# Altium PCB USB_TO_IO_PCB_V102.PcbDoc
Units mil, origin at the board's own origin, x right, y up, seen from the top; angles counter-clockwise.
Board outline 6000 x 4000 mil, 2 copper layers (Top Layer, Bottom Layer); 28 components, 29 nets, 113 pads, 13 vias.
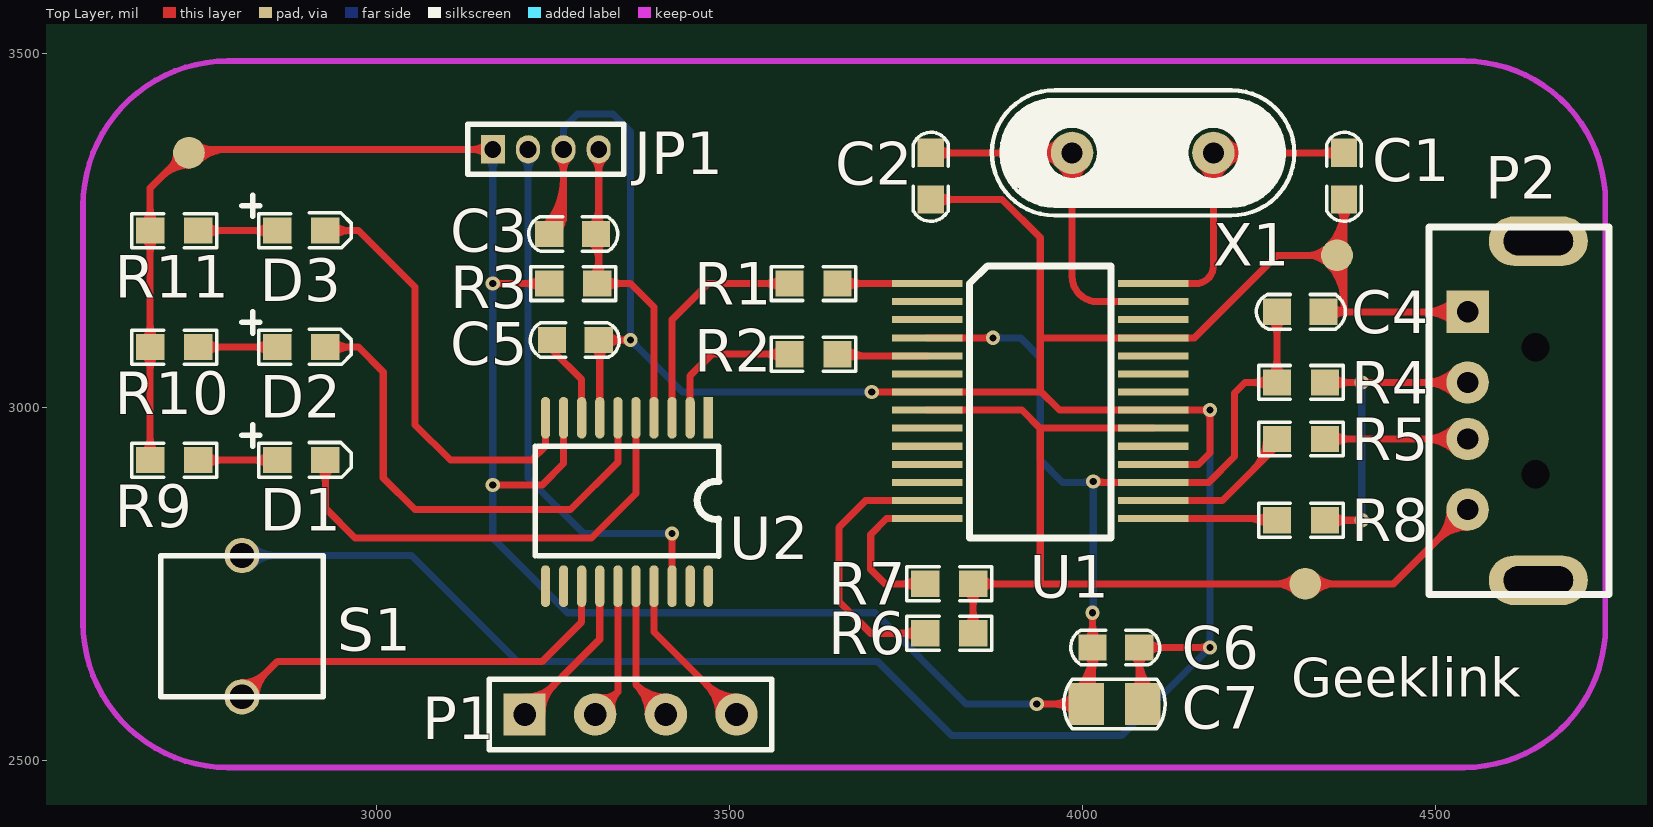
[diagram p0: Top Layer view]
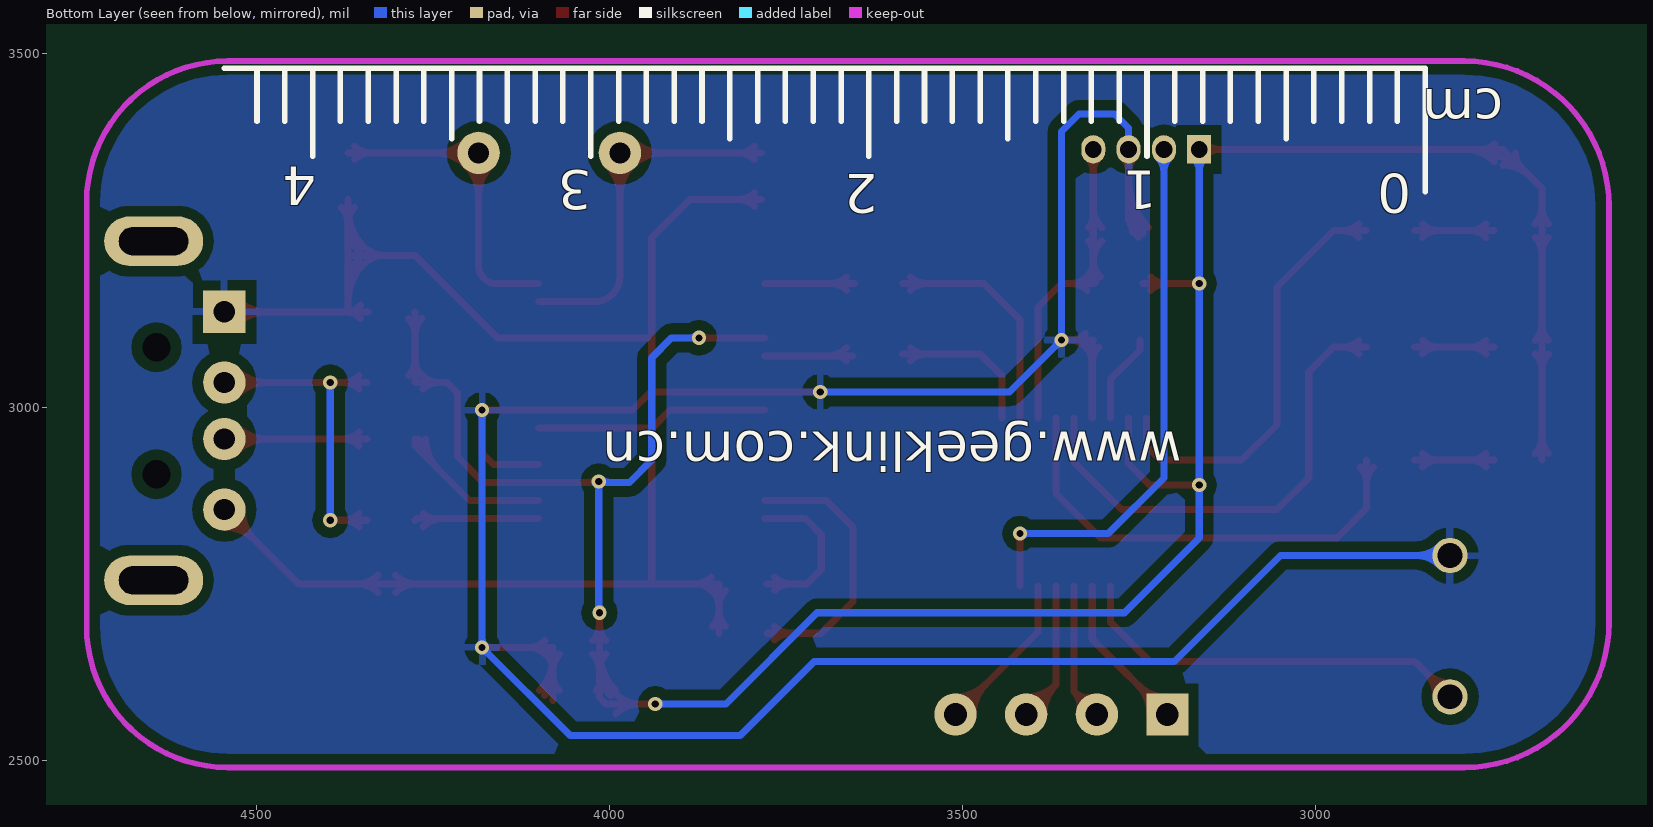
[diagram p1: Bottom Layer view, seen from below]

## Layer stack, top to bottom
Top Layer: signal copper 1.4
Dielectric: dielectric 12.6, FR-4, Dk 4.8
Bottom Layer: signal copper 1.4

## Board outline
1000,1000 7000,1000 7000,5000 1000,5000

## Design rules (kind name [scope] priority, off if disabled: settings)
Clearance [All] p1: gap=10
PolygonConnect [All] p1: connectstyle=Relief reliefconductorwidth=10 reliefentries=4 polygonreliefangle="90 Angle"
RoutingVias [All] p1: holewidth=28 width=50 viastyle="Through Hole" minholewidth=28 minwidth=50 maxholewidth=28 maxwidth=50
SilkscreenOverComponentPads [All] p1: minsilkscreentomaskgap=10
SolderMaskExpansion [All] p1: expansion=4
Width [All] p1: maxlimit=50 minlimit=8 preferedwidth=10
27 further rules are at their usual default settings.

## Components (designator, comment, footprint, x,y, rotation, side; value= is the part's Value field where it differs from the comment)
C1 "Cap_0603" CS0603 4370,3360 r270 top
C2 "Cap_0603" CS0603 3785,3360 r270 top
C3 "Cap_0603" CS0603 3245,3245 r0 top
C4 "Cap_0603" CS0603 4275,3135 r0 top
C5 "Cap_0603" CS0603 3315,3095 r180 top
C6 "Cap_0603" CS0603 4080,2660 r180 top
C7 "Cap_0603" CAP_8050 4085,2580 r180 top
D1 "LED" LED_0603 2860,2925 r0 top
D2 "LED" LED_0603 2860,3085 r0 top
D3 "LED" LED_0603 2860,3250 r0 top
JP1 "MHDR1X4" MHDR1X4 3165,3365 r0 top
P1 "Header 4" HDR1X4 3210,2565 r0 top
P2 "USB" USB_M 4545,3135 r270 top
R1 "Reg_0603" S0603 3585,3175 r0 top
R2 "Reg_0603" S0603 3585,3075 r0 top
R3 "Reg_0603" S0603 3245,3175 r0 top
R4 "Reg_0603" S0603 4275,3035 r0 top
R5 "Reg_0603" S0603 4275,2955 r0 top
R6 "Reg_0603" S0603 3845,2680 r180 top
R7 "Reg_0603" S0603 3845,2750 r180 top
R8 "Reg_0603" S0603 4275,2840 r0 top
R9 "Reg_0603" S0603 2680,2925 r0 top
R10 "Reg_0603" S0603 2680,3085 r0 top
R11 "Reg_0603" S0603 2680,3250 r0 top
S1 "SW" SWITCH-2 2810,2590 r90 top
U1 "PL2303HX" SSOP28 3780,3175 r0 top
U2 "STM8S003F3" STM8S003F3 3470,2985 r270 top
X1 "CRYSTAL" XATL 3985,3360 r0 top

## Footprints (in the part's own frame and the unit in brackets; to place one, negate y for a bottom-side part, rotate by r counter-clockwise, add the part's x,y. Pads: shape width x height; smd on the part's side, far side on the other; paste and mask are expansions set on the pad)
CAP_8050 [mm]
  rect 1.27x1.5 smd: 1(0,0) 2(2.032,0)
  silkscreen extent -0.81,-0.89 2.84,0.89
CS0603 [mil]
  rect 40x37 smd: 1(0,0) 2(66,0)
  silkscreen extent -29,-25 97,25
HDR1X4 [mil]
  rect 59.06x59.06 hole 32: 1(0,0)
  round 60 hole 32: 2(100,0) 3(200,0) 4(300,0)
  silkscreen extent -50,-50 350,50
LED_0603 [mil]
  rect 40x37 smd: 1(0,0) 2(68,0)
  silkscreen extent -50,-24 105,50
MHDR1X4 [mil]
  rect 34x40 hole 24: 1(0,0)
  oval 34x40 hole 24: 2(50,0) 3(100,0) 4(150,0)
  silkscreen extent -35,-35 185,35
S0603 [mil]
  rect 40x37 smd: 1(0,0) 2(68,0)
  silkscreen extent -26,-24 94,24
SSOP28 [mil]
  rect 100x10 smd: 1(0,0) 2(0,-25.59) 3(0,-51.18) 4(0,-76.77) 5(0,-102.36) 6(0,-127.95) 7(0,-153.54) 8(0,-179.13) 9(0,-204.72) 10(0,-230.32) 11(0,-255.91) 12(0,-281.5) 13(0,-307.09) 14(0,-332.68) 15(320,-332.68) 16(320,-307.09) 17(320,-281.5) 18(320,-255.91) 19(320,-230.32) 20(320,-204.72) 21(320,-179.13) 22(320,-153.54) 23(320,-127.95) 24(320,-102.36) 25(320,-76.77) 26(320,-51.18) 27(320,-25.59) 28(320,0)
  silkscreen extent 60,-360 260,25
STM8S003F3 [mm]
  rect 1.5x0.33 smd: 1(0,0)
  oval 1.5x0.33 smd: 2(0,-0.65) 3(0,-1.3) 4(0,-1.95) 5(0,-2.6) 6(0,-3.25) 7(0,-3.9) 8(0,-4.55) 9(0,-5.2) 10(0,-5.85) 11(6.054,-5.85) 12(6.054,-5.2) 13(6.054,-4.55) 14(6.054,-3.9) 15(6.054,-3.25) 16(6.054,-2.6) 17(6.054,-1.95) 18(6.054,-1.3) 19(6.054,-0.65) 20(6.054,0)
  silkscreen extent 1.02,-6.22 4.98,0.38
SWITCH-2 [mil]
  round 50 hole 35: 1(0,0) 2(200,0)
  silkscreen extent 0,-115 200,115
USB_M [mil]
  rect 60x60 hole 30: 1(0,0)
  round 60 hole 30: 2(100,0) 3(180,0) 4(280,0)
  oval 70x140 hole 40 slot 98.43 at 90 deg: 5(-100,100) 6(380,100)
  round 30 hole 40: 7(50,96) 7(230,96)
  silkscreen extent -120,-55 400,200
XATL [mil]
  round 60 hole 30: 1(0,0) 2(200,0)
  silkscreen extent -114,-89 315,89

## Part data
C1 C2 C3 C4 C5 C6 C7: library part cap
D1 D2 D3: library part LED0
JP1: "Header, 4-Pin"
P2: library part "Header 4"
R1 R2 R3 R4 R5 R6 R7 R8 R9 R10 R11: library part Register

## Free pads (board coordinates)
  round 45 smd: 0(4315,2750) 0(4360,3215) 1(2735,3360)

## Via types
v1: diameter 20, hole 10, Top Layer to Bottom Layer, 13 vias

## Nets (pads, with @x,y where several pads share a name; then routed paths per layer and width w, separated by ;. In a path a pad name is that pad's centre, name@x,y a point inside that pad or via, vN(x,y) a via of type N, cw(c..) or ccw(c..) an arc to the next point about the centre after c; other vN are vias at no path point)
D+: P2.2 R4.2 R8.2 | length 802.9
  Top Layer w10: R8.2 v1(4395,2840) v1@4400,2840 ; R4.2 v1(4395,3035) P2.2 ; R8.2@4354.05,2830.45 cw(c4377.09,2807.41) 4377.09,2840 cw(c4377.09,2872.59) R8.2@4354.05,2849.55 ; R4.2@4354.05,3025.45 cw(c4377.09,3002.41) 4377.09,3035 cw(c4377.09,3067.59) R4.2@4354.05,3044.55 ; v1@4391.46,2836.46 ccw(c4382.93,2827.93) 4382.93,2840 ccw(c4382.93,2852.07) v1@4391.46,2843.54 ; v1@4391.46,3031.46 ccw(c4382.93,3022.93) 4382.93,3035 ccw(c4382.93,3047.07) v1@4391.46,3038.54 ; v1@4398.54,3031.46 cw(c4407.07,3022.93) 4407.07,3035 cw(c4407.07,3047.07) v1@4398.54,3038.54 ; P2.2@4527.32,3017.32 ccw(c4484.64,2974.64) 4484.64,3035 ccw(c4484.64,3095.36) P2.2@4527.32,3052.68 ; P2.2@4534.39,3024.39 ccw(c4508.79,2998.79) 4508.79,3035 ccw(c4508.79,3071.21) P2.2@4534.39,3045.61
  Bottom Layer w10: v1@4391.46,2843.54 ccw(c4382.93,2852.07) 4395,2852.07 ccw(c4407.07,2852.07) v1@4398.54,2843.54 ; v1@4391.46,3031.46 cw(c4382.93,3022.93) 4395,3022.93 cw(c4407.07,3022.93) v1@4398.54,3031.46 ; v1(4395,2840) v1(4395,3035)
D-: P2.3 R5.2 | length 404.9
  Top Layer w10: R5.2 P2.3 ; R5.2@4354.05,2945.45 cw(c4377.09,2922.41) 4377.09,2955 cw(c4377.09,2987.59) R5.2@4354.05,2964.55 ; P2.3@4527.32,2937.32 ccw(c4484.64,2894.64) 4484.64,2955 ccw(c4484.64,3015.36) P2.3@4527.32,2972.68 ; P2.3@4534.39,2944.39 ccw(c4508.79,2918.79) 4508.79,2955 ccw(c4508.79,2991.21) P2.3@4534.39,2965.61
GND: C1.2 C2.2 C3.1 C4.2 C5.1 C6.1 C7.1 JP1.3 P2.1 pad.0@4360,3215 S1.2 U1.7 U1.18 U1.21 U1.25 U2.7 | length 6399.1
  Top Layer w10: C3.1@3236.95,3254.55 ccw(c3169.25,3322.25) 3265,3322.25 ; C3.1@3244.03,3247.47 ccw(c3193.39,3298.11) 3265,3298.11 ; C3.1 3265,3265 ; C3.1@3247.47,3258.47 ccw(c3249.08,3280.91) 3265,3265 ; C3.1@3251.1,3240.4 ccw(c3217.53,3273.97) 3265,3273.97 ; JP1.3@3256.51,3353.51 cw(c3236.03,3333.03) 3265,3333.03 cw(c3293.97,3333.03) JP1.3@3273.49,3353.51 ; C3.1@3259.74,3247.64 cw(c3278.59,3251.4) 3265,3265 ; JP1.3 3265,3265 ; C5.1@3306.95,3085.45 cw(c3284.01,3062.51) 3316.46,3062.51 ; U2.7 3316.46,3093.54 C5.1 v1(3360,3095) ; 3316.46,3062.3 cw(c3349.2,3062.3) 3326.05,3085.45 cw(c3349.09,3062.41) 3349.09,3095 cw(c3349.09,3127.59) C5.1@3326.05,3104.55 ; v1@3356.46,3091.46 ccw(c3347.93,3082.93) 3347.93,3095 ccw(c3347.93,3107.07) v1@3356.46,3098.54 ; v1(3701.46,3021.46) U1.7 3938.54,3021.46 ; v1@3704.99,3017.92 cw(c3713.53,3009.39) 3713.53,3021.46 cw(c3713.53,3033.53) v1@3704.99,3024.99 ; C2.2 3886,3294 3940,3240 3940,3022.91 3967.05,2995.87 ; C2.2@3794.55,3284.45 cw(c3817.59,3261.41) 3817.59,3294 cw(c3817.59,3326.59) C2.2@3794.55,3303.55 ; 3941.77,3098.23 U1.25 4158.23,3098.23 4275,3215 4360,3215 pad.0@4370,3215 ; 3969.13,2995.87 U1.21 v1(4180,2995.87) ; C6.1@4070.45,2650.45 cw(c4047.41,2627.41) 4080,2627.41 cw(c4112.59,2627.41) C6.1@4089.55,2650.45 ; C7.1@4070.86,2598.67 ccw(c4048.79,2620.74) 4080,2620.74 ccw(c4121.21,2620.74) C7.1@4092.07,2591.6 ; C7.1@4080,2585 C6.1 v1(4180,2660) ; C6.1@4080,2644.88 ccw(c4145.36,2644.88) C7.1@4099.14,2598.67 ; C6.1@4091.05,2650.45 cw(c4114.09,2627.41) 4114.09,2660 cw(c4114.09,2692.59) C6.1@4091.05,2669.55 ; U1.18 4164.09,2919.09 4180,2935 v1@4180,2995 ; v1@4176.46,2656.46 ccw(c4167.93,2647.93) 4167.93,2660 ccw(c4167.93,2672.07) v1@4176.46,2663.54 ; v1@4176.46,2999.4 cw(c4167.93,3007.94) 4167.93,2995.87 cw(c4167.93,2983.79) 4176.46,2992.33 cw(c4167.93,2983.79) 4180,2983.79 cw(c4192.07,2983.79) v1@4183.54,2992.33 ; C4.2 P2.1 ; C4.2@4352.05,3125.45 cw(c4375.09,3102.41) 4375.09,3135 cw(c4375.09,3167.59) C4.2@4352.05,3144.55 ; pad.0@4354.7,3209.7 cw(c4317.75,3172.75) 4370,3172.75 ; pad.0@4354.7,3220.3 ccw(c4317.75,3257.25) 4370,3257.25 ; C1.2@4360.45,3282.95 cw(c4337.41,3259.91) 4370,3259.91 cw(c4402.59,3259.91) C1.2@4379.55,3282.95 ; 4370,3140 pad.0@4370,3215 ; 4370,3148.61 ccw(c4293.61,3148.61) 4347.63,3202.63 ccw(c4317.75,3172.75) 4317.75,3215 ccw(c4317.75,3257.25) 4347.63,3227.37 ccw(c4293.61,3281.39) C1.2@4370,3281.39 ; C1.2 pad.0@4370,3215 ; P2.1@4527.32,3117.32 ccw(c4484.64,3074.64) 4484.64,3135 ccw(c4484.64,3195.36) P2.1@4527.32,3152.68 ; P2.1@4534.39,3124.39 ccw(c4508.79,3098.79) 4508.79,3135 ccw(c4508.79,3171.21) P2.1@4534.39,3145.61
  Bottom Layer w10: S1.2 3050,2790 3200,2640 3710,2640 3815,2535 4055,2535 v1(4180,2660) v1(4180,2995.87) ; S1.2@2824.14,2775.86 cw(c2858.28,2741.72) 2858.28,2790 cw(c2858.28,2838.28) S1.2@2824.14,2804.14 ; JP1.3 3265,3395 3285,3415 3335,3415 3360,3390 v1(3360,3095) 3433.54,3021.46 v1(3701.46,3021.46) ; v1@3360,3090 cw(c3360,3077.93) 3368.54,3086.46 cw(c3377.07,3095) v1@3365,3095 ; v1@3697.92,3017.92 ccw(c3689.39,3009.39) 3689.39,3021.46 ccw(c3689.39,3033.53) v1@3697.92,3024.99 ; v1@4175,2660 cw(c4162.93,2660) 4171.46,2651.46 cw(c4180,2642.93) v1@4180,2655 ; v1@4176.46,2663.54 ccw(c4167.93,2672.07) 4180,2672.07 ccw(c4192.07,2672.07) v1@4183.54,2663.54 ; v1@4176.46,2992.33 cw(c4167.93,2983.79) 4180,2983.79 cw(c4192.07,2983.79) v1@4183.54,2992.33
NetC1_1: C1.1 U1.28 X1.2 | length 798.8
  Top Layer w10: U1.28 4160,3175 ccw(c4160,3200) 4185,3200 X1.2 C1.1 ; X1.2@4167.32,3342.32 cw(c4124.64,3299.64) 4185,3299.64 cw(c4245.36,3299.64) 4202.68,3342.32 cw(c4245.36,3299.64) 4245.36,3360 cw(c4245.36,3420.36) X1.2@4202.68,3377.68 ; X1.2@4174.39,3349.39 cw(c4148.79,3323.79) 4185,3323.79 cw(c4221.21,3323.79) 4195.61,3349.39 cw(c4221.21,3323.79) 4221.21,3360 cw(c4221.21,3396.21) X1.2@4195.61,3370.61 ; C1.1@4360.45,3350.45 ccw(c4337.41,3327.41) 4337.41,3360 ccw(c4337.41,3392.59) C1.1@4360.45,3369.55
NetC2_1: C2.1 U1.27 X1.1 | length 864.9
  Top Layer w10: C2.1 X1.1 3985,3185 ccw(c4020.59,3185) 4020.59,3149.41 U1.27 ; C2.1@3794.55,3350.45 cw(c3817.59,3327.41) 3817.59,3360 cw(c3817.59,3392.59) C2.1@3794.55,3369.55 ; X1.1@3967.32,3377.68 cw(c3924.64,3420.36) 3924.64,3360 cw(c3924.64,3299.64) 3967.32,3342.32 cw(c3924.64,3299.64) 3985,3299.64 cw(c4045.36,3299.64) X1.1@4002.68,3342.32 ; X1.1@3974.39,3370.61 cw(c3948.79,3396.21) 3948.79,3360 cw(c3948.79,3323.79) 3974.39,3349.39 cw(c3948.79,3323.79) 3985,3323.79 cw(c4021.21,3323.79) X1.1@3995.61,3349.39
NetC5_2: C5.2 U2.8 | length 127.3
  Top Layer w10: C5.2 3249,3081 3290.87,3039.13 U2.8
NetD1_1: D1.1 R9.2 | length 214.4
  Top Layer w10: R9.2 D1.1 ; R9.2@2759.05,2915.45 cw(c2782.09,2892.41) 2782.09,2925 cw(c2782.09,2957.59) R9.2@2759.05,2934.55 ; D1.1@2848.95,2915.45 ccw(c2825.91,2892.41) 2825.91,2925 ccw(c2825.91,2957.59) D1.1@2848.95,2934.55
NetD2_1: D2.1 R10.2 | length 214.4
  Top Layer w10: R10.2 D2.1 ; R10.2@2759.05,3075.45 cw(c2782.09,3052.41) 2782.09,3085 cw(c2782.09,3117.59) R10.2@2759.05,3094.55 ; D2.1@2848.95,3075.45 ccw(c2825.91,3052.41) 2825.91,3085 ccw(c2825.91,3117.59) D2.1@2848.95,3094.55
NetD3_1: D3.1 R11.2 | length 214.4
  Top Layer w10: R11.2 D3.1 ; R11.2@2759.05,3240.45 cw(c2782.09,3217.41) 2782.09,3250 cw(c2782.09,3282.59) R11.2@2759.05,3259.55 ; D3.1@2848.95,3240.45 ccw(c2825.91,3217.41) 2825.91,3250 ccw(c2825.91,3282.59) D3.1@2848.95,3259.55
NetR1_2: R1.2 U1.1 | length 178.2
  Top Layer w10: R1.2 U1.1 ; R1.2@3664.05,3165.45 cw(c3687.09,3142.41) 3687.09,3175 cw(c3687.09,3207.59) R1.2@3664.05,3184.55
NetR2_2: R2.2 U1.5 | length 175.8
  Top Layer w10: R2.2@3655.36,3072.64 U1.5 ; R2.2@3664.05,3065.45 cw(c3681.39,3048.11) 3681.39,3072.64 ; R2.2@3664.05,3084.55 ccw(c3692.8,3113.3) 3692.8,3072.64
NetR5_1: R5.1 U1.16 | length 292.8
  Top Layer w10: U1.16 4197.91,2867.91 4275,2945 R5.1 ; 4242.32,2912.32 ccw(c4199.64,2955) R5.1@4260,2955 ; 4259.39,2929.39 ccw(c4233.79,2955) R5.1@4270,2955
NetR6_2: R6.2 U1.13 | length 437.5
  Top Layer w10: R6.2@3765.95,2670.45 ccw(c3742.91,2647.41) 3742.91,2680 ccw(c3742.91,2712.59) R6.2@3765.95,2689.55 ; R6.2 3700,2680 3655,2725 3655,2830 3692.91,2867.91 U1.13
NetR7_2: R7.2 U1.14 | length 275.7
  Top Layer w10: R7.2@3765.95,2740.45 ccw(c3742.91,2717.41) 3742.91,2750 ccw(c3742.91,2782.59) R7.2@3765.95,2759.55 ; R7.2 3720,2750 3700,2770 3700,2820 3722.32,2842.32 U1.14
NetR8_1: R8.1 U1.15 | length 227.2
  Top Layer w10: U1.15 4272.68,2842.32 R8.1 ; 4235.3,2842.32 cw(c4235.3,2801.8) R8.1@4263.95,2830.45 ; 4246.52,2842.32 ccw(c4246.52,2866.98) R8.1@4263.95,2849.55
NetS1_1: S1.1 U2.13 | length 651.3
  Top Layer w10: S1.1 2860,2640 3235,2640 3290.87,2695.87 U2.13 ; S1.1@2810,2610 ccw(c2810,2658.28) 2844.14,2624.14 ccw(c2878.28,2590) S1.1@2830,2590
NRST: C3.2 JP1.4 R3.2 U2.4 | length 691.9
  Top Layer w10: C3.2@3302.95,3235.45 cw(c3273.87,3206.37) 3315,3206.37 ; C3.2@3302.95,3254.55 ccw(c3273.87,3283.63) 3315,3283.63 ; R3.2@3304.95,3184.55 ccw(c3280.7,3208.8) 3315,3208.8 ; JP1.4@3306.51,3353.51 cw(c3286.03,3333.03) 3315,3333.03 cw(c3343.97,3333.03) JP1.4@3323.49,3353.51 ; R3.2@3311,3177 R3.2 3360,3175 3393.23,3141.77 U2.4 ; R3.2@3315,3177 JP1.4 ; 3315,3206.38 ccw(c3345.88,3206.38) 3324.05,3184.55 ccw(c3347.09,3207.59) 3347.09,3175 ccw(c3347.09,3142.41) R3.2@3324.05,3165.45 ; 3315,3218.44 cw(c3339.06,3218.44) C3.2@3322.05,3235.45 ; 3315,3271.56 ccw(c3339.06,3271.56) C3.2@3322.05,3254.55
PA1_LED: D1.2 U2.5 | length 709.5
  Top Layer w10: D1.2@2918.45,2915.45 cw(c2895.41,2892.41) 2928,2892.41 cw(c2960.59,2892.41) D1.2@2937.55,2915.45 ; D1.2 2928,2857 2970,2815 3305,2815 3367.64,2877.64 U2.5
PA2_LED: D2.2 U2.6 | length 739.1
  Top Layer w10: D2.2 2975,3085 3010,3050 3010,2900 3055,2855 3275,2855 3342.05,2922.05 U2.6 ; D2.2@2939.05,3075.45 cw(c2962.09,3052.41) 2962.09,3085 cw(c2962.09,3117.59) D2.2@2939.05,3094.55
PA3_LED: D3.2 U2.10 | length 660.2
  Top Layer w10: D3.2 2975,3250 3055,3170 3055,2975 3105,2925 3220,2925 3239.68,2944.68 U2.10 ; D3.2@2939.05,3240.45 cw(c2962.09,3217.41) 2962.09,3250 cw(c2962.09,3282.59) D3.2@2939.05,3259.55
PC4_IO: P1.1 U2.14 | length 373.9
  Top Layer w10: P1.1 3316.46,2671.46 U2.14 ; P1.1@3210,2579.53 ccw(c3210,2614.6) 3234.8,2589.8 ccw(c3259.6,2565) P1.1@3224.53,2565 ; P1.1@3210,2589.53 ccw(c3210,2648.74) 3251.87,2606.87 ccw(c3293.74,2565) P1.1@3234.53,2565
PC5_IO: P1.2 U2.15 | length 252.6
  Top Layer w10: P1.2 3342.05,2597.05 ; P1.2@3315.52,2589.38 ccw(c3321.84,2617.25) 3342.05,2597.05 ; P1.2@3334.38,2570.52 cw(c3362.25,2576.84) 3342.05,2597.05 ; U2.15 3342.05,2597.05
PC6_IO: P1.3 U2.16 | length 349.2
  Top Layer w10: U2.16 3367.64,2607.36 ; P1.3@3385,2565.13 ccw(c3325.72,2565.45) 3367.64,2607.36 ; P1.3@3395,2565.08 ccw(c3359.43,2565.27) 3384.58,2590.42 ccw(c3409.73,2615.57) P1.3@3409.92,2580 ; P1.3@3409.87,2590 cw(c3409.55,2649.28) 3367.64,2607.36 ; P1.3 3367.64,2607.36
PC7_IO: P1.4 U2.17 | length 381.7
  Top Layer w10: U2.17 3393.23,2681.77 P1.4 ; P1.4@3485,2565 ccw(c3424.64,2565) 3467.32,2607.68 ccw(c3510,2650.36) P1.4@3510,2590 ; P1.4@3495,2565 ccw(c3458.79,2565) 3484.39,2590.61 ccw(c3510,2616.21) P1.4@3510,2580
PD1/SWIM: JP1.2 U2.18 | length 859.4
  Top Layer w10: v1@3415.28,2817.65 cw(c3406.75,2809.11) 3418.82,2809.11 cw(c3430.89,2809.11) v1@3422.35,2817.65 ; U2.18 v1(3418.82,2821.18)
  Bottom Layer w10: JP1.2@3206.51,3353.51 cw(c3186.03,3333.03) 3215,3333.03 cw(c3243.97,3333.03) JP1.2@3223.49,3353.51 ; JP1.2 3215,2900 3293.82,2821.18 v1(3418.82,2821.18) ; v1@3415.28,2817.65 ccw(c3406.75,2809.11) 3406.75,2821.18 ccw(c3406.75,2833.25) v1@3415.28,2824.72
RXD: R2.1 U2.2 | length 263.9
  Top Layer w10: U2.2 3444.41,3044.41 3475,3075 R2.1 ; R2.1@3573.95,3065.45 ccw(c3550.91,3042.41) 3550.91,3075 ccw(c3550.91,3107.59) R2.1@3573.95,3084.55
TXD: R1.1 U2.3 | length 377.4
  Top Layer w10: U2.3 3418.82,3123.82 3470,3175 R1.1 ; R1.1@3573.95,3165.45 ccw(c3550.91,3142.41) 3550.91,3175 ccw(c3550.91,3207.59) R1.1@3573.95,3184.55
V5.0V: P2.4 pad.0@4315,2750 R6.1 R7.1 U1.8 U1.20 | length 1801.9
  Top Layer w10: U1.8 3914.13,2995.87 3940,2970 3940,2750 ; R6.1@3835.45,2689.55 ccw(c3812.41,2712.59) 3845,2712.59 ccw(c3877.59,2712.59) R6.1@3854.55,2689.55 ; R7.1@3835.45,2740.45 cw(c3812.41,2717.41) 3845,2717.41 cw(c3877.59,2717.41) R7.1@3854.55,2740.45 ; R6.1 R7.1 3940,2750 ; R7.1@3856.05,2740.45 cw(c3879.09,2717.41) 3879.09,2750 cw(c3879.09,2782.59) R7.1@3856.05,2759.55 ; 3940.28,2970.28 U1.20 ; pad.0@4302.63,2737.63 ccw(c4272.75,2707.75) 4272.75,2750 ccw(c4272.75,2792.25) pad.0@4302.63,2762.37 ; pad.0@4327.37,2737.63 cw(c4357.25,2707.75) 4357.25,2750 cw(c4357.25,2792.25) pad.0@4327.37,2762.37 ; P2.4@4520,2855 cw(c4459.64,2855) 4502.32,2812.32 cw(c4545,2769.64) P2.4@4545,2830 ; P2.4@4530,2855 cw(c4493.79,2855) 4519.39,2829.39 cw(c4545,2803.79) P2.4@4545,2840 ; P2.4 4440,2750 3940,2750
VDD: C4.1 C6.2 C7.2 JP1.1 pad.1 R3.1 R4.1 R9.1 R10.1 R11.1 U1.4 U1.17 U2.9 | length 5110.7
  Top Layer w10: R9.1@2670.45,2934.55 ccw(c2647.41,2957.59) 2680,2957.59 ccw(c2712.59,2957.59) R9.1@2689.55,2934.55 ; R10.1@2670.45,3075.45 cw(c2647.41,3052.41) 2680,3052.41 cw(c2712.59,3052.41) R10.1@2689.55,3075.45 ; R10.1@2670.45,3094.55 ccw(c2647.41,3117.59) 2680,3117.59 ccw(c2712.59,3117.59) R10.1@2689.55,3094.55 ; R11.1@2670.45,3240.45 cw(c2647.41,3217.41) 2680,3217.41 cw(c2712.59,3217.41) R11.1@2689.55,3240.45 ; R11.1@2670.45,3259.55 ccw(c2647.41,3282.59) 2680,3282.59 ccw(c2712.59,3282.59) R11.1@2689.55,3259.55 ; R9.1 R10.1 R11.1 2680,3310 2735,3365 JP1.1 ; 2696.59,3326.59 cw(c2735,3288.18) pad.1@2735,3342.5 ; 2708.66,3338.66 ccw(c2687.32,3360) pad.1@2717.5,3360 ; 2713.66,3343.66 cw(c2735,3322.32) pad.1@2735,3352.5 ; pad.1@2740.3,3354.7 cw(c2765.18,3329.82) 2765.18,3365 cw(c2765.18,3390.18) pad.1@2747.37,3372.37 ; pad.1@2747.37,3347.63 cw(c2789.32,3305.68) 2789.32,3365 ; JP1.1@3156.51,3356.51 ccw(c3136.03,3336.03) 3136.03,3365 ccw(c3136.03,3393.97) JP1.1@3156.51,3373.49 ; v1(3165,2890) 3235,2890 3265.28,2920.28 U2.9 ; v1(3165,3175) R3.1 ; v1@3168.54,2886.46 cw(c3177.07,2877.93) 3177.07,2890 cw(c3177.07,2902.07) v1@3168.54,2893.54 ; v1@3168.54,3171.46 cw(c3177.07,3162.93) 3177.07,3175 cw(c3177.07,3187.07) v1@3168.54,3178.54 ; R3.1@3233.95,3165.45 ccw(c3210.91,3142.41) 3210.91,3175 ccw(c3210.91,3207.59) R3.1@3233.95,3184.55 ; U1.4 v1(3873.23,3098.23) ; v1@3869.69,3094.69 ccw(c3861.16,3086.16) 3861.16,3098.23 ccw(c3861.16,3110.3) v1@3869.69,3101.76 ; v1(3935,2580) C7.2 4014,2589 C6.2 v1(4014,2709) ; v1@3938.54,2576.46 cw(c3947.07,2567.93) 3947.07,2580 cw(c3947.07,2592.07) v1@3938.54,2583.54 ; C7.2@3990.86,2565.86 ccw(c3956.72,2531.72) 3956.72,2580 ccw(c3956.72,2628.28) C7.2@3990.86,2594.14 ; C7.2@3990.86,2598.67 ccw(c3934.99,2654.54) C6.2@4014,2654.54 ; C7.2@3997.93,2591.6 ccw(c3959.13,2630.4) 4014,2630.4 ; C6.2@4004.45,2650.45 cw(c3981.41,2627.41) 4014,2627.41 cw(c4046.59,2627.41) C6.2@4023.55,2650.45 ; C6.2@4004.45,2669.55 ccw(c3981.41,2692.59) 4014,2692.59 ccw(c4046.59,2692.59) C6.2@4023.55,2669.55 ; v1@4010.46,2705.46 cw(c4001.93,2696.93) 4014,2696.93 cw(c4026.07,2696.93) v1@4017.54,2705.46 ; 4014,2611.08 ccw(c4031.56,2611.08) C7.2@4019.14,2598.67 ; v1@4015,2893.5 U1.17 4178.5,2893.5 4215,2930 4215,3020 4230,3035 R4.1 C4.1 ; v1@4018.54,2898.54 ccw(c4030.68,2910.68) 4030.68,2893.5 ; R4.1@4263.95,3025.45 ccw(c4240.91,3002.41) 4240.91,3035 ccw(c4240.91,3067.59) R4.1@4263.95,3044.55 ; R4.1@4265.45,3044.55 ccw(c4242.41,3067.59) 4275,3067.59 ccw(c4307.59,3067.59) R4.1@4284.55,3044.55 ; C4.1@4265.45,3125.45 cw(c4242.41,3102.41) 4275,3102.41 cw(c4307.59,3102.41) C4.1@4284.55,3125.45
  Bottom Layer w10: JP1.1@3156.51,3353.51 cw(c3136.03,3333.03) 3165,3333.03 cw(c3193.97,3333.03) JP1.1@3173.49,3353.51 ; v1@3161.46,2893.54 ccw(c3152.93,2902.07) 3165,2902.07 ccw(c3177.07,2902.07) v1@3168.54,2893.54 ; v1@3161.46,3171.46 cw(c3152.93,3162.93) 3165,3162.93 cw(c3177.07,3162.93) v1@3168.54,3171.46 ; v1@3161.46,3178.54 ccw(c3152.93,3187.07) 3165,3187.07 ccw(c3177.07,3187.07) v1@3168.54,3178.54 ; JP1.1 v1(3165,3175) v1(3165,2890) 3165,2815 3271,2709 3706,2709 3835,2580 v1(3935,2580) ; v1(3873.23,3098.23) 3911.77,3098.23 3940,3070 3940,2925 3971.5,2893.5 v1@4013.5,2893.5 ; v1@3876.76,3094.69 cw(c3885.3,3086.16) 3885.3,3098.23 cw(c3885.3,3110.3) v1@3876.76,3101.76 ; v1@3931.46,2576.46 ccw(c3922.93,2567.93) 3922.93,2580 ccw(c3922.93,2592.07) v1@3931.46,2583.54 ; 3999.32,2893.5 ccw(c3999.32,2910.68) v1@4011.46,2898.54 ; v1@4010.46,2712.54 ccw(c3999.51,2723.49) 4015,2723.49 ; v1@4011.46,2891.46 cw(c4002.93,2882.93) 4015,2882.93 cw(c4027.07,2882.93) v1@4018.54,2891.46 ; v1@4015,2710 v1(4015,2895)
pads on no net: P2.5 P2.6 P2.7 U1.2 U1.3 U1.6 U1.9 U1.10 U1.11 U1.12 U1.19 U1.22 U1.23 U1.24 U1.26 U2.1 U2.11 U2.12 U2.19 U2.20

## Polygon pours and split planes (outlines as drawn)
GND on Bottom Layer "Top Layer-No Net" (solid, remove dead copper, pour order 6): 2850,3490 4620,3490 4735,3375 4740,3370 4740,2690 4740,2605 4650,2515 4625,2490 2825,2490 2710,2490 2590,2610 2585,2615 2585,3265 2585,3370 2680,3465 2705,3490 2850,3490

## Keep-outs
Keep-Out Layer:
  lines w7.87: 2585,2695 ccw(c2790,2695) 2790,2490 4540,2490 ccw(c4540,2690) 4740,2690 4740,3290 ccw(c4540,3290) 4540,3490 2790,3490 ccw(c2790,3285) 2585,3285 2585,2695

## Silkscreen, mask and mechanical layers (free items; w line width, h text height)
Top Overlay:
  text "Geeklink" at 4295,2590 h55
Bottom Overlay:
  lines w7.87: 2845.2,3305 2845.2,3480 4420,3480 ; 2884.57,3405 2884.57,3480 ; 2923.94,3405 2923.94,3480 ; 2963.31,3405 2963.31,3480 ; 3002.68,3405 3002.68,3480 ; 3042.05,3380 3042.05,3480 ; 3081.42,3405 3081.42,3480 ; 3120.79,3405 3120.79,3480 ; 3160.16,3405 3160.16,3480 ; 3199.53,3405 3199.53,3480 ; 3238.9,3355 3238.9,3480 ; 3278.27,3405 3278.27,3480 ; 3317.64,3405 3317.64,3480 ; 3357.01,3405 3357.01,3480 ; 3396.38,3405 3396.38,3480 ; 3435.75,3380 3435.75,3480 ; 3475.12,3405 3475.12,3480 ; 3514.49,3405 3514.49,3480 ; 3553.86,3405 3553.86,3480 ; 3593.23,3405 3593.23,3480 ; 3632.6,3355 3632.6,3480 3632.6,3405 ; 3671.97,3405 3671.97,3480 ; 3711.34,3405 3711.34,3480 ; 3750.71,3405 3750.71,3480 ; 3790.08,3405 3790.08,3480 ; 3829.45,3380 3829.45,3480 ; 3868.82,3405 3868.82,3480 ; 3908.19,3405 3908.19,3480 ; 3947.56,3405 3947.56,3480 ; 3986.93,3405 3986.93,3480 ; 4026.3,3355 4026.3,3480 ; 4065.67,3405 4065.67,3480 ; 4105.04,3405 4105.04,3480 ; 4144.41,3405 4144.41,3480 ; 4183.78,3405 4183.78,3480 ; 4223.15,3380 4223.15,3480 ; 4262.52,3405 4262.52,3480 ; 4301.89,3405 4301.89,3480 ; 4341.26,3405 4341.26,3480 ; 4380.63,3405 4380.63,3480 ; 4420,3355 4420,3480 ; 4459.37,3405 4459.37,3480 ; 4498.74,3405 4498.74,3480 ; 4545,3480 4420,3480
  text "cm" at 2735,3450 h55 r180
  text "4" at 4415,3340 h55 r180
  text "1" at 3225,3335 h55 r180
  text "3" at 4025,3335 h55 r180
  text "0" at 2865,3330 h55 r180
  text "2" at 3620,3330 h55 r180
  text "www.geeklink.com.cn" at 3190,2965 h55 r180